# Altium PCB PDB_Rev2_PCB.PcbDoc (part 2 of 2)
Units mil, origin at the board's own origin, x right, y up, seen from the top; angles counter-clockwise.
Board outline 6000 x 4000 mil, 2 copper layers (Top Layer, Bottom Layer); 45 components, 21 nets, 154 pads, 0 vias.
Unrouted connection lines stored in the file: 128.
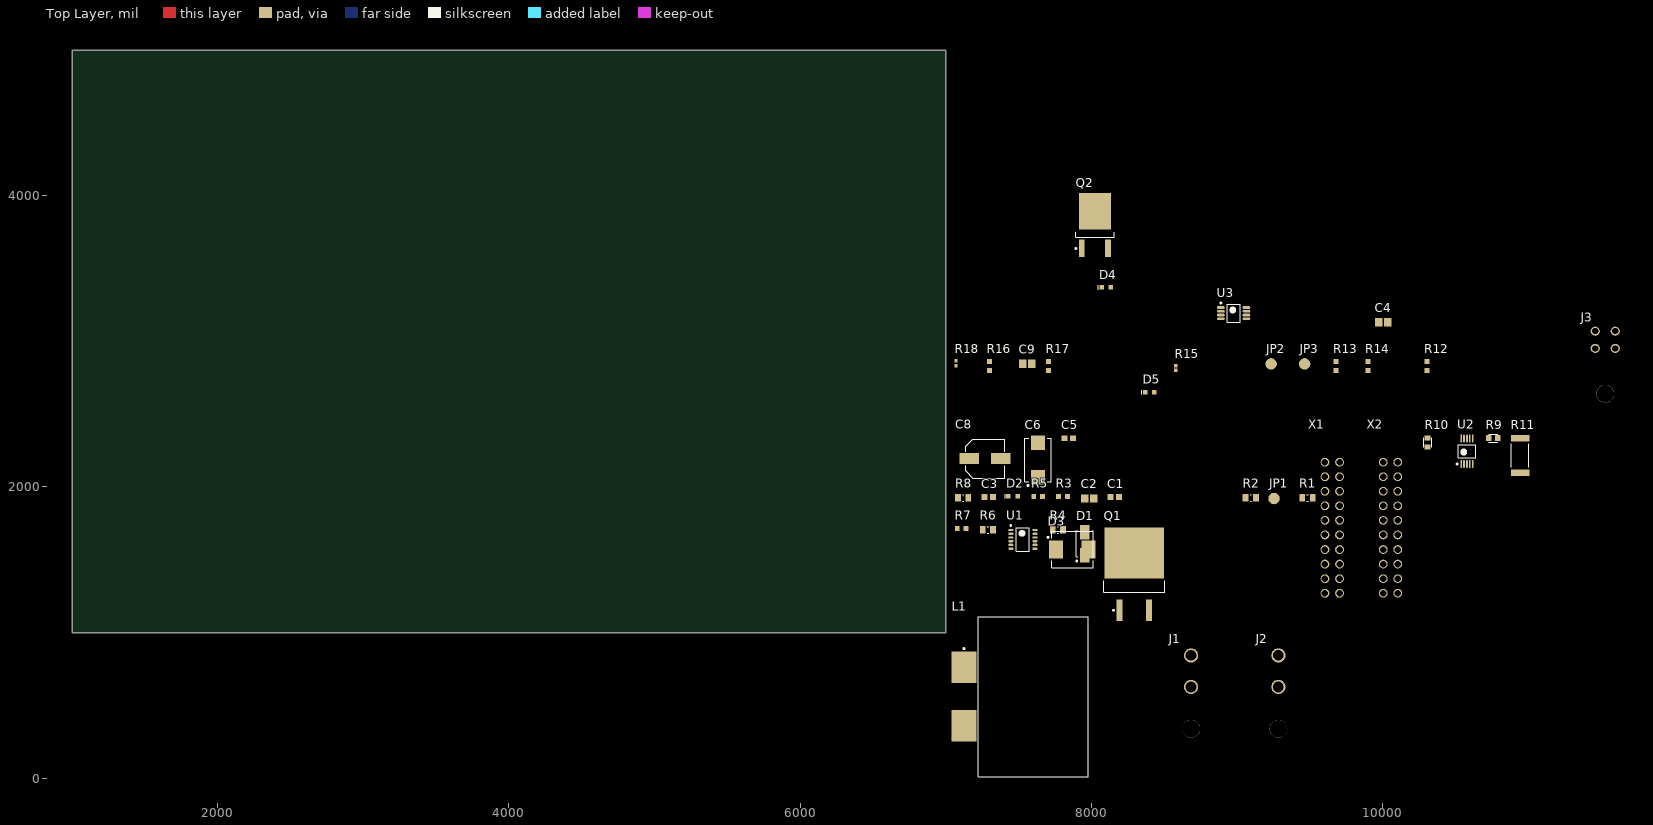
[diagram p0: Top Layer view]

## Part data (continued)
R14: library part 0603-10KR, "RES SMD 10K OHM 5% 1/10W 0603", Case/Package=0603, Case Code (Metric)=1608, Manufacturer=Yageo, Manufacturer Part Number=RC0603JR-0710KL, Max Operating Temperature=155°C, Max Power Dissipation=100mW, Min Operating Temperature=-55°C, Resistance=10kR, Supplier Part Number 1=311-10KGRDKR-ND, Temperature Coefficient=100ppm/°C, Tolerance=5%, Voltage Rating=50V, Case Code (Imperial)=0603, ComponentLink1Description=http://www.yageo.com/documents/recent/PYu-RC_Group_51_RoHS_L_10.pdf?src-supplier=Digi-Key, ComponentLink1URL=http://www.yageo.com/documents/recent/PYu-RC_Group_51_RoHS_L_10.pdf?src-supplier=Digi-Key, Composition="Thick Film", Contact Plating=Tin,Matte, Depth=0.8mm, Features="Moisture Resistant", Height - Seated (Max)=0.022inch, Lead Free="Lead Free", Length=0.063inch, Military Standard=Not, Number of Pins=2, Number of Terminations=2, Packaging="Tape and Reel", Power Rating=100mW, Pricing 1="1=0.1, 10=0.019, 100=0.0077, 1000=0.00347, 2500=0.00301 (USD)", Radiation Hardening=No, REACH SVHC=Unknown, Stock 1=3006558, Supplier 1=Digi-Key, Termination=SMD/SMT, Voltage Rating (DC)=50V, Width=0.031inch
R15: library part 0402-30.5KR, "RES 30.5K OHM 1% 1/16W 0402", Manufacturer="KOA Speer", Manufacturer Part Number=RN73R1ETTP3052F25, Supplier Part Number 1=2019-RN73R1ETTP3052F25CT-ND, Pricing 1="1=0.47, 10=0.336, 100=0.1346, 1000=0.0663, 2500=0.06142, 5000=0.05558 (USD)", Stock 1=9795, Supplier 1=Digi-Key
R16: library part 0603-665R, "RES SMD 665 OHM 1% 1/10W 0603", Case/Package=0603, Case Code (Metric)=1608, Manufacturer=Yageo, Manufacturer Part Number=RC0603FR-07665RL, Max Operating Temperature=155°C, Max Power Dissipation=100mW, Min Operating Temperature=-55°C, Package Quantity=1, Supplier Part Number 1=311-665HRDKR-ND, Temperature Coefficient=100ppm/°C, Tolerance=1%, Voltage Rating=75V, Voltage Rating (DC)=50V, Case Code (Imperial)=0603, ComponentLink1Description=http://www.yageo.com/documents/recent/PYu-RC_Group_51_RoHS_L_9.pdf?src-supplier=Digi-Key, ComponentLink1URL=http://www.yageo.com/documents/recent/PYu-RC_Group_51_RoHS_L_9.pdf?src-supplier=Digi-Key, ComponentLink2Description=http://www.yageo.com/documents/recent/PYu-RC0603_51_RoHS_L_4.pdf?src-supplier=Avnet, ComponentLink2URL=http://www.yageo.com/documents/recent/PYu-RC0603_51_RoHS_L_4.pdf?src-supplier=Avnet, ComponentLink3Description=http://www.yageo.com/documents/recent/PYu-RC_Group_51_RoHS_L_10.pdf?src-supplier=Digi-Key, ComponentLink3URL=http://www.yageo.com/documents/recent/PYu-RC_Group_51_RoHS_L_10.pdf?src-supplier=Digi-Key, ComponentLink4Description=http://www.yageo.com/documents/recent/PYu-RC0603_51_RoHS_L_4.pdf?src-supplier=Avnet+Europe, ComponentLink4URL=http://www.yageo.com/documents/recent/PYu-RC0603_51_RoHS_L_4.pdf?src-supplier=Avnet+Europe, Composition="Thick Film", Contact Plating=Tin,Matte, Depth=0.8mm, Features="Moisture Resistant", Height=0.022inch, Lead Free="Lead Free", Length=1.6mm, Military Standard=Not, Number of Terminations=2, Packaging="Tape and Reel", Power Rating=100mW, Pricing 1="1=0.1, 10=0.023, 100=0.0094, 1000=0.00421, 2500=0.00366 (USD)", Resistance=665R, Stock 1=143871, Supplier 1=Digi-Key, Termination=SMD/SMT, Weight=7.1E-05oz, Width=0.8mm
R17: library part 0603-180R, "RES SMD 180 OHM 1% 1/10W 0603", Case/Package=0603, Case Code (Metric)=1608, Manufacturer="TE Connectivity", Manufacturer Part Number=CRGCQ0603F180R, Max Operating Temperature=155°C, Max Power Dissipation=100mW, Min Operating Temperature=-55°C, Supplier Part Number 1=A129679DKR-ND, Temperature Coefficient=100ppm/°C, Tolerance=1%, Case Code (Imperial)=0603, ComponentLink1Description=https://www.te.com/commerce/DocumentDelivery/DDEController?Action=srchrtrv&DocNm=1773204-3&DocType=DS&DocLang=English&src-supplier=Digi-Key, ComponentLink1URL=https://www.te.com/commerce/DocumentDelivery/DDEController?Action=srchrtrv&DocNm=1773204-3&DocType=DS&DocLang=English&src-supplier=Digi-Key, ComponentLink2Description=https://www.te.com/commerce/DocumentDelivery/DDEController?Action=srchrtrv&amp;DocNm=1773204-3&amp;DocType=DS&amp;DocLang=English&src-supplier=Digi-Key, ComponentLink2URL=https://www.te.com/commerce/DocumentDelivery/DDEController?Action=srchrtrv&amp;DocNm=1773204-3&amp;DocType=DS&amp;DocLang=English&src-supplier=Digi-Key, ComponentLink3Description=http://www.te.com/commerce/DocumentDelivery/DDEController?Action=srchrtrv&DocNm=1773204-3&DocType=DS&DocLang=English&src-supplier=Digi-Key, ComponentLink3URL=http://www.te.com/commerce/DocumentDelivery/DDEController?Action=srchrtrv&DocNm=1773204-3&DocType=DS&DocLang=English&src-supplier=Digi-Key, ComponentLink4Description=http://www.farnell.com/datasheets/2609223.pdf?src-supplier=Farnell, ComponentLink4URL=http://www.farnell.com/datasheets/2609223.pdf?src-supplier=Farnell, Composition="Thick Film", Features="Moisture Resistant,Automotive AEC-Q200", Number of Terminations=2, Packaging="Tape and Reel", Pricing 1="1=0.1, 10=0.03, 100=0.012, 1000=0.00541, 2500=0.00469 (USD)", Resistance=180R, Stock 1=17329, Supplier 1=Digi-Key
R18: library part 0402-10KR, "RES 10K OHM 1% 1/10W 0402", Case/Package=0402, Case Code (Metric)=1005, Manufacturer="KOA Speer", Manufacturer Part Number=RK73H1ETTP1002F, Max Operating Temperature=155°C, Min Operating Temperature=-55°C, Package Quantity=10000, Power Rating=63mW, Resistance=10kR, Supplier Part Number 1=2019-RK73H1ETTP1002FDKR-ND, Temperature Coefficient=100ppm/°C, Tolerance=1%, Voltage Rating=50V, Case Code (Imperial)=0402, ComponentLink1Description=https://www.verical.com/server-webapp/html/getDatasheet?partID=117055&src-supplier=Verical, ComponentLink1URL=https://www.verical.com/server-webapp/html/getDatasheet?partID=117055&src-supplier=Verical, Composition="Thick Film", Depth=0.5mm, Height=0.35mm, Lead Free="Lead Free", Length=1mm, Military Standard=Not, Mount="Surface Mount", Packaging="Tape and Reel", Pricing 1="1=0.1, 10=0.024, 100=0.0097, 1000=0.00437, 2500=0.0038, 5000=0.00314 (USD)", Stock 1=8271315, Supplier 1=Digi-Key, Termination=SMD/SMT, Voltage Rating (DC)=50V, Width=0.5mm
U1: "IC SURGE STOPPER HV 12-MSOP", Case/Package=TSSOP, Clamping Voltage=27V, Manufacturer="Analog Devices / Linear Technology", Package Quantity=2500, Supplier Part Number 1=LT4363IMS-2#TRPBFDKR-ND, Working Voltage=80V, ComponentLink1Description=http://www.linear.com/docs/40854?src-supplier=Digi-Key, ComponentLink1URL=http://www.linear.com/docs/40854?src-supplier=Digi-Key, Lead Free="Lead Free", Manufacturer Part Number=LT4363IMS-2#TRPBF, Number of Circuits=1, Number of Pins=12, Packaging="Tape and Reel", Pricing 1="1=6.96, 10=6.29, 25=5.9976, 100=4.9735, 250=4.53468, 500=4.24212, 1000=3.864 (USD)", RoHS Compliant=Yes, Stock 1=0, Supplier 1=Digi-Key
U2: "Bi Directional Current and Power Monitor 10-Pin VSSOP T/R", Case/Package=VSSOP, Input Bias Current=10uA, Input Offset Voltage (Vos)=2.5uV, Manufacturer="Texas Instruments", Max Operating Temperature=125°C, Max Supply Voltage=5.5V, Min Operating Temperature=-40°C, Min Supply Voltage=2.7V, Nominal Supply Current=330uA, Output Current=10mA, Package Quantity=1, Supplier Part Number 1=296-29034-1-ND, Accuracy=0.02%, Bandwidth=3.5kHz, Common Mode Rejection Ratio=140dB, ComponentLink1Description=http://www.farnell.com/datasheets/1840205.pdf?src-supplier=Element14, ComponentLink1URL=http://www.farnell.com/datasheets/1840205.pdf?src-supplier=Element14, ComponentLink2Description=http://www.ti.com/lit/ds/symlink/ina226.pdf?src-supplier=Digi-Key, ComponentLink2URL=http://www.ti.com/lit/ds/symlink/ina226.pdf?src-supplier=Digi-Key, ComponentLink3Description=http://www.ti.com/lit/gpn/ina226?src-supplier=Mouser, ComponentLink3URL=http://www.ti.com/lit/gpn/ina226?src-supplier=Mouser, ComponentLink4Description=http://www.ti.com/general/docs/lit/getliterature.tsp?genericPartNumber=INA226&&fileType=pdf&src-supplier=Avnet, ComponentLink4URL=http://www.ti.com/general/docs/lit/getliterature.tsp?genericPartNumber=INA226&&fileType=pdf&src-supplier=Avnet, Contact Plating=Gold, Lead Free="Lead Free", Manufacturer Part Number=INA226AIDGSR, Mount="Surface Mount", Number of Amplifiers=1, Number of Pins=10, Packaging="Tape and Reel", Pricing 1="1=3.37, 10=3.027, 25=2.862, 100=2.3532, 250=2.11152, 500=2.0352, 1000=1.69176 (USD)", Radiation Hardening=No, REACH SVHC="No SVHC", RoHS Compliant=Yes, Series=-, Stock 1=55797, Supplier 1=Digi-Key, Supply Current=330uA
U3: "DC DC Cntrlr Single-OUT Buck 4.5V to 35V Input 8-Pin VSSOP T/R", Case/Package=VSSOP, Manufacturer="TI National Semiconductor", Max Frequency=1MHz, Max Operating Temperature=125°C, Min Operating Temperature=-40°C, Operating Supply Voltage=35V, Output Current=4A, Quiescent Current=280uA, Supplier Part Number 1=296-35277-6-ND, Switching Frequency=1.4MHz, ComponentLink1Description=http://www.ti.com/lit/ds/symlink/lm3489.pdf?src-supplier=Digi-Key, ComponentLink1URL=http://www.ti.com/lit/ds/symlink/lm3489.pdf?src-supplier=Digi-Key, Contact Plating=Tin, Duty Cycle=100%, Lead Free="Lead Free", Manufacturer Part Number=LM3489MMX/NOPB, Max Duty Cycle=100%, Mount="Surface Mount", Number of Channels=1, Number of Outputs=1, Number of Pins=8, Output Voltage=35V, Packaging="Tape and Reel", Pricing 1="1=1.66, 10=1.485, 25=1.4096, 100=1.0825, 250=0.95664, 500=0.9063, 1000=0.7049 (USD)", Radiation Hardening=No, RoHS Compliant=Yes, Stock 1=11594, Supplier 1=Digi-Key
X1 X2: library part RECT_MOLEX_20pin, "Connector Header Through Hole 20 position 0.100\" (2.54mm)", ComponentLink1Description=https://www.digikey.ca/en/products/detail/0702462001/WM6548-ND/760170?utm_campaign=buynow&utm_medium=aggregator&curr=cad&utm_source=octopart, ComponentLink1URL=https://www.digikey.ca/en/products/detail/0702462001/WM6548-ND/760170?utm_campaign=buynow&utm_medium=aggregator&curr=cad&utm_source=octopart, Supplier 1=Digi-Key, Supplier Part Number 1=WM6548-ND

## Nets (pads, with @x,y where several pads share a name; then routed paths per layer and width w, separated by ;. In a path a pad name is that pad's centre, name@x,y a point inside that pad or via, vN(x,y) a via of type N, cw(c..) or ccw(c..) an arc to the next point about the centre after c; other vN are vias at no path point)
3V2: C4.2 R9.1 R10.1 R12.2 R13.2 R14.2 U2.6
5V_OUT: C5.2 C6.1 D5.1 JP3.1 L1.2 R9.2 R15.2 X2.1 X2.2 X2.3 X2.4 X2.5 X2.6 X2.7 X2.8 X2.9 X2.10
12V_OUT: JP1.1 R1.1 R4.2 R11.2 U1.2 U2.8 U2.10
13V2_OUT: C8.1 C9.2 D4.1 JP2.1 Q2.3 R11.1 U2.9 U3.1 U3.8 X1.1 X1.2 X1.3 X1.4 X1.5 X1.6 X1.7 X1.8 X1.9 X1.10
ALERT_OUT: J3.3 R14.1 U2.3
FB: C5.1 R4.1 R6.2 R15.1 R18.2 U1.1 U3.4
FLT: C1.1 C2.1 C3.1 C4.1 C6.2 C8.2 C9.1 D1.2 D2.2 D3.2 J1.2 J2.2 J3.4 R6.1 R8.1 R10.2 R16.1 R17.1 R18.1 U1.9 U1.10 U2.1 U2.2 U2.7 U3.2 U3.5 U3.6 X1.11 X1.12 X1.13 X1.14 X1.15 X1.16 X1.17 X1.18 X1.19 X1.20 X2.11 X2.12 X2.13 X2.14 X2.15 X2.16 X2.17 X2.18 X2.19 X2.20
NetC1_2: C1.2 R2.1 U1.4
NetD2_1: D2.1 R3.1
NetD3_1: D3.1 L1.1
NetD4_2: D4.2 R16.2
NetD5_2: D5.2 R17.2
NetQ1_1: Q1.1 R2.2
NetQ2_1: Q2.1 U3.7
NetR5_1: R5.1 R7.2 U1.8
NetR5_2: R5.2 R8.2 U1.7
SCL_OUT: J3.2 R13.1 U2.5
SDA_OUT: J3.1 R12.1 U2.4
SNS: Q1.3 R1.2 U1.3
TMR: C3.2 U1.12
Vcc: C2.2 D1.1 J1.1 J2.1 Q1.4 R3.2 R7.1 U1.5 U1.6
pads on no net: J1.3 J2.3 J3.5 U1.11 U3.3